# Altium PCB OVPSwitch.PcbDoc
Units mm, origin at the board's own origin, x right, y up, seen from the top; angles counter-clockwise.
Board outline 60 x 60 mm, 2 copper layers (Top Layer, Bottom Layer); 32 components, 19 nets, 99 pads, 32 vias.
Unrouted connection lines stored in the file: 58.
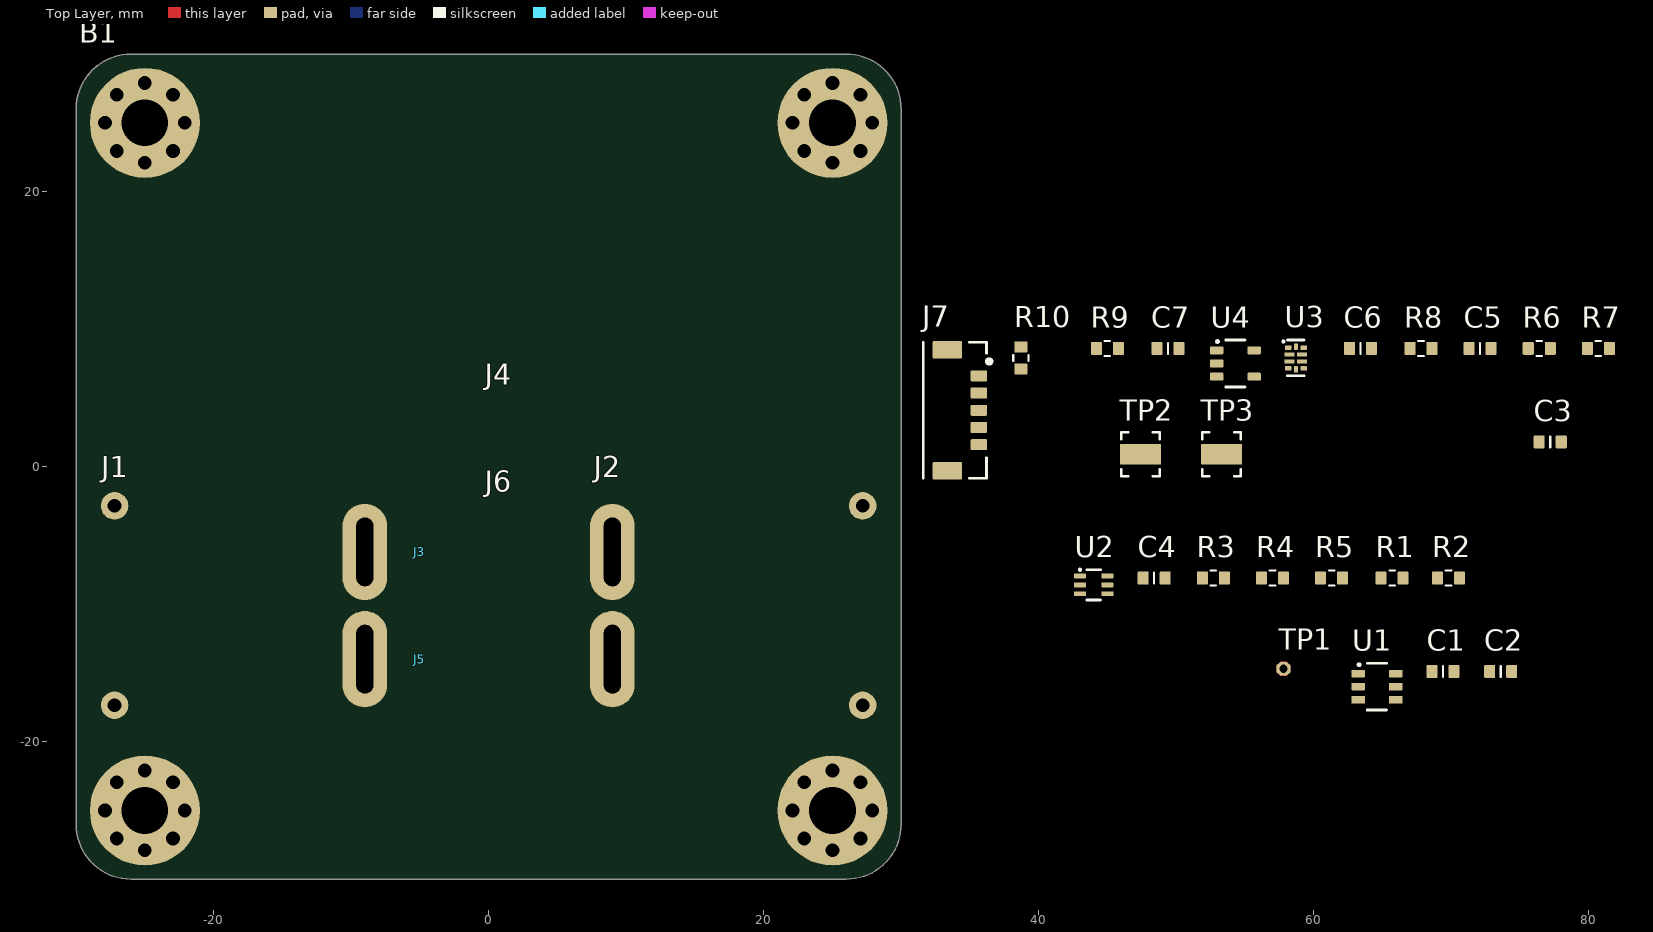
[diagram p0: Top Layer view]
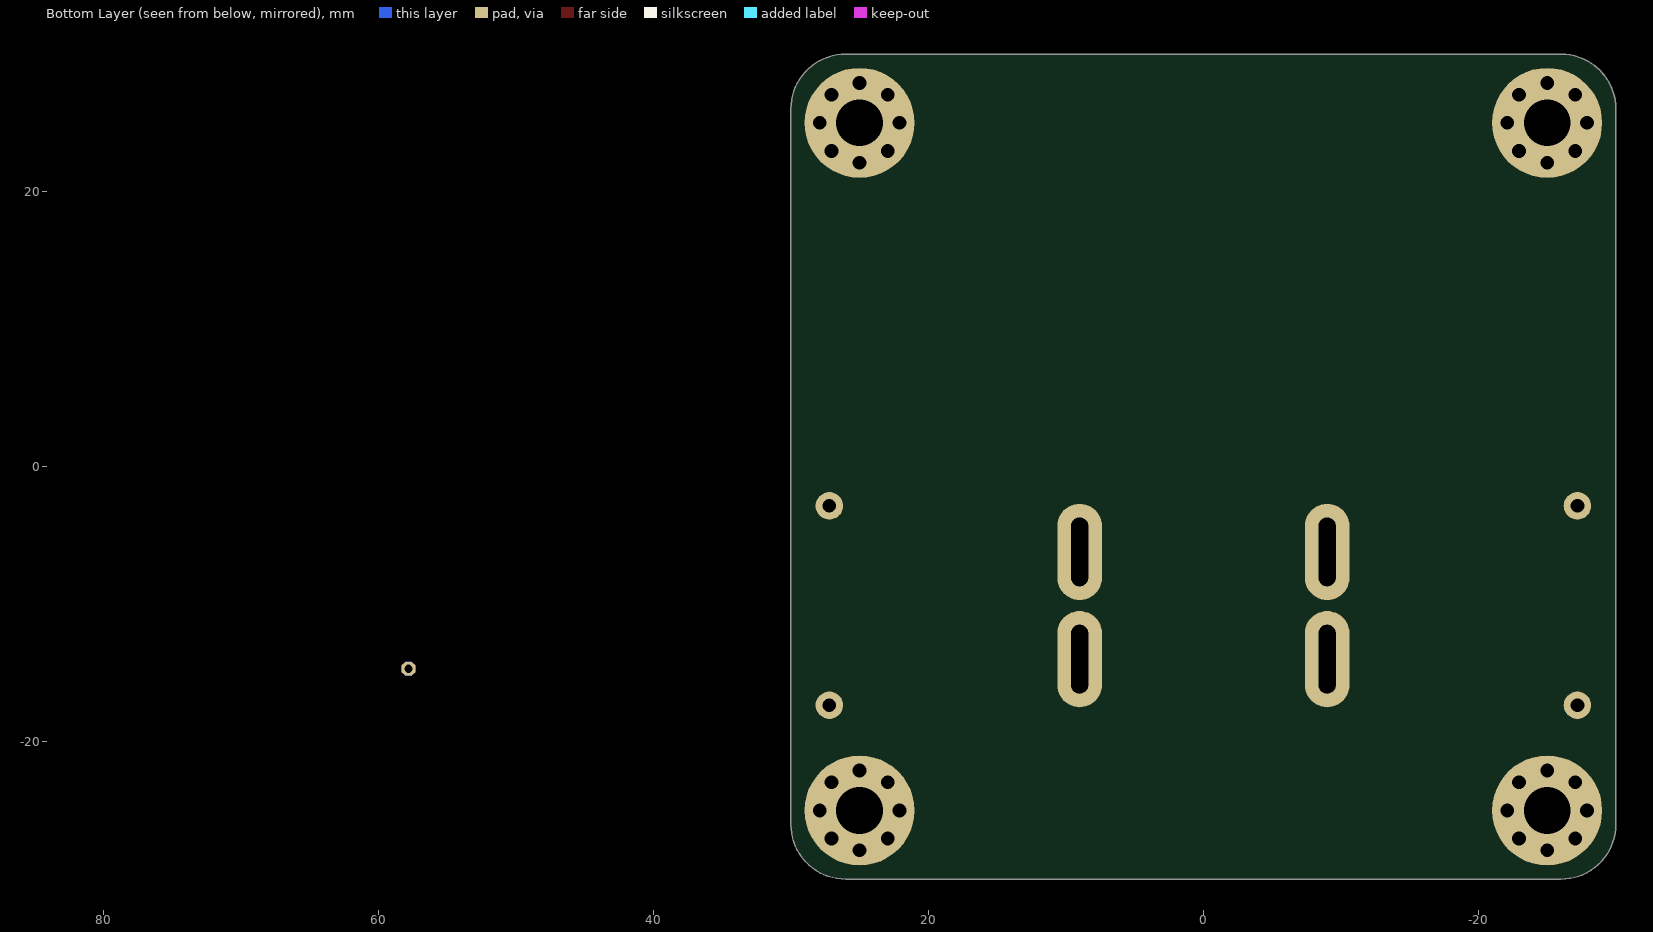
[diagram p1: Bottom Layer view, seen from below]

## Layer stack, top to bottom
Top Solder: solder mask 0.0102, Solder Resist, Dk 3.5
Top Layer: signal copper 0.0356
Dielectric 1: dielectric 0.32, FR-4, Dk 4.8
Bottom Layer: signal copper 0.0356
Bottom Solder: solder mask 0.0102, Solder Resist, Dk 3.5

## Board outline
-30,-26 -30,26 cw(c-26,26) -26,30 26,30 cw(c26,26) 30,26 30,-26 cw(c26,-26) 26,-30 -26,-30 cw(c-26,-26)

## Design rules (kind name [scope] priority, off if disabled: settings)
Clearance [All] p1: gap=0.254 ignorepadtopadclearanceinfootprint=FALSE except(0: Arc-Hole Track-Hole SMDPad-Hole THPad-Hole Via-Hole Fill-Hole Poly-Hole Region-Hole Text-Hole)
PolygonConnect [All] p1: connectstyle=Relief reliefconductorwidth=0.254 reliefentries=4 polygonreliefangle="90 Angle" airgapwidth=0.254
RoutingVias [All] p1: holewidth=0.711 width=1.27 viastyle="Through Hole" minholewidth=0.711 minwidth=1.27 maxholewidth=0.711 maxwidth=1.27
SolderMaskExpansion [All] p1: expansion=0.102 istentingtop=FALSE
Width [All] p1: maxlimit=0.254 minlimit=0.254 preferedwidth=0.254
30 further rules are at their usual default settings.

## Components (designator, comment, footprint, x,y, rotation, side; value= is the part's Value field where it differs from the comment)
B1 "Board Outline Square" PCB_OUTLINE_SQUARE 0,0 r0 top locked
C1 "Capacitor - Ceramic - Generic" CAPACITOR_0603(1608)_GENERIC 69.399,-14.9 r0 top value=100nF
C2 "Capacitor - Ceramic - Generic" CAPACITOR_0603(1608)_GENERIC 73.599,-14.9 r0 top value=1uF
C3 "Capacitor - Ceramic - Generic" CAPACITOR_0603(1608)_GENERIC 77.199,1.8 r0 top value=1uF
C4 "Capacitor - Ceramic - Generic" CAPACITOR_0603(1608)_GENERIC 48.4,-8.1 r0 top value=100nF
C5 "Capacitor - Ceramic - Generic" CAPACITOR_0603(1608)_GENERIC 72.1,8.6 r0 top value=100nF
C6 "Capacitor - Ceramic - Generic" CAPACITOR_0603(1608)_GENERIC 63.4,8.6 r0 top value=100nF
C7 "Capacitor - Ceramic - Generic" CAPACITOR_0603(1608)_GENERIC 49.4,8.6 r0 top value=120pF
J1 "PP45 Staple" CONNECTOR_ACCESSORY_PP45-STAPLE_ANDERSON -27.2,-10.1 r270 top
J2 "PP45 Staple" CONNECTOR_ACCESSORY_PP45-STAPLE_ANDERSON 27.2,-10.1 r90 top
J3 "PP45" CONNECTOR_BTOC_PP45_ANDERSON -9,-6.2 r270 top
J4 "PP45" CONNECTOR_BTOC_PP45_ANDERSON 9,-6.2 r90 top
J5 "PP45" CONNECTOR_BTOC_PP45_ANDERSON -9,-14 r270 top
J6 "PP45" CONNECTOR_BTOC_PP45_ANDERSON 9,-14 r90 top
J7 "Connector - Header - 5P 2M - Generic" CONNECTOR_HEADER_MOLEX_5055670581 33.9,4.1 r90 top
R1 "Resistor - Fixed - Generic" RESISTOR_0603(1608)_GENERIC 65.7,-8.1 r0 top value=100kR
R2 "Resistor - Fixed - Generic" RESISTOR_0603(1608)_GENERIC 69.8,-8.1 r0 top value=100kR
R3 "Resistor - Fixed - Generic" RESISTOR_0603(1608)_GENERIC 52.7,-8.1 r0 top value=100kR
R4 "Resistor - Fixed - Generic" RESISTOR_0603(1608)_GENERIC 57,-8.1 r0 top value=100kR
R5 "Resistor - Fixed - Generic" RESISTOR_0603(1608)_GENERIC 61.3,-8.1 r0 top value=2kR
R6 "Resistor - Fixed - Generic" RESISTOR_0603(1608)_GENERIC 76.4,8.6 r0 top value=100kR
R7 "Resistor - Fixed - Generic" RESISTOR_0603(1608)_GENERIC 80.7,8.6 r0 top value=200kR
R8 "Resistor - Fixed - Generic" RESISTOR_0603(1608)_GENERIC 67.8,8.6 r0 top value=100kR
R9 "Resistor - Fixed - Generic" RESISTOR_0603(1608)_GENERIC 45,8.6 r0 top value=10kR
R10 "Resistor - Fixed - Generic" RESISTOR_0603(1608)_GENERIC 38.7,7.9 r90 top value=10kR
TP1 "Test Point - THT" TESTPOINT_THT_OCTAGON 57.799,-14.7 r90 top
TP2 "519XTR" TESTPOINT_LOOP_SMD_KEYSTONE_519X 47.399,0.9 r0 top
TP3 "519XTR" TESTPOINT_LOOP_SMD_KEYSTONE_519X 53.299,0.9 r0 top
U1 "REF35409QDBV" SOT23-6(DBV0006A)_TI 64.599,-16 r0 top
U2 "TLV3603DCK" SC70-6(DCK0006A)_TI 44,-8.6 r0 top
U3 "TPS22997" WQFN-10(RYZ0010A)_TI 58.7,7.9 r0 top
U4 "SN74AUP1G32DBV" SOT23-5(DBV0005A)_TI 54.3,7.5 r0 top

## Footprints (in the part's own frame and the unit in brackets; to place one, negate y for a bottom-side part, rotate by r counter-clockwise, add the part's x,y. Pads: shape width x height; smd on the part's side, far side on the other; paste and mask are expansions set on the pad)
CAPACITOR_0603(1608)_GENERIC [mm]
  rrect20% 0.8x0.95 smd: 1(-0.8,0) 2(0.8,0)
  silkscreen extent 0,-0.4 0,0.4, body extent -0.8,-0.4 0.8,0.4, height 0.9
CONNECTOR_ACCESSORY_PP45-STAPLE_ANDERSON [mm]
  round 2 hole 1: 1(-7.25,0) 1(7.25,0)
  oval 7x3.25 on Mech16: ""(-4,18.2) ""(3.9,18.2)
  body extent -7.75,-0.5 7.75,0.5, height 9.4
CONNECTOR_BTOC_PP45_ANDERSON [mm]
  oval 7x3.25 hole 1.25 slot 5 at 0 deg: 1(0,0)
  oval 7x3.25 on Mech16: ""(-7.9,0) ""(0,7.92) ""(7.9,0)
  body extent -4.45,-28.1 3.96,0.52, height 8.39
CONNECTOR_HEADER_MOLEX_5055670581 [mm]
  rrect20% 0.8x1.2 smd: 1(2.5,-1.75) 2(1.25,-1.75) 3(0,-1.75) 4(-1.25,-1.75) 5(-2.5,-1.75)
  rrect20% 1.3x2.15 smd mask+0.076: M1(4.4,0.545) M2(-4.4,0.545)
  silkscreen extent -4.95,-2.65 4.95,2.3
PCB_OUTLINE_SQUARE [mm]
  round 8 hole 3.4: 1(-25,-25) 1(-25,25) 1(25,-25) 1(25,25)
RESISTOR_0603(1608)_GENERIC [mm]
  rrect20% 0.8x0.95 smd: 1(-0.8,0) 2(0.8,0)
  silkscreen extent -0.2,-0.55 0.2,0.55, body extent -0.8,-0.4 0.8,0.4, height 0.55
SC70-6(DCK0006A)_TI [mm]
  rrect20% 0.85x0.35 smd: 1(-1,0.65) 2(-1,0) 3(-1,-0.65) 4(1,-0.65) 5(1,0) 6(1,0.65)
  silkscreen extent -1.05,-1.1 0.5,1.15, body extent -1.05,-1 1.05,1, height 1
SOT23-5(DBV0005A)_TI [mm]
  rrect20% 0.972x0.558 smd: 1(-1.362,0.95) 2(-1.362,0) 3(-1.362,-0.95) 4(1.362,-0.95) 5(1.362,0.95)
  silkscreen extent -1.35,-1.7 0.7,1.7, body extent -1.5,-1.52 1.5,1.52, height 1.45
SOT23-6(DBV0006A)_TI [mm]
  rrect20% 0.972x0.558 smd: 1(-1.362,0.95) 2(-1.362,0) 3(-1.362,-0.95) 4(1.362,-0.95) 5(1.362,0) 6(1.362,0.95)
  silkscreen extent -1.35,-1.7 0.7,1.7, body extent -1.5,-1.52 1.5,1.52, height 1.45
TESTPOINT_LOOP_SMD_KEYSTONE_519X [mm]
  rrect10% 3x1.5 smd: 1(0,0)
  silkscreen extent -1.4,-1.6 1.4,1.6, body extent -1.25,-1.5 1.25,1.5, height 2.49
TESTPOINT_THT_OCTAGON [mm]
  oct 1x1 hole 0.6: 1(0,0)
  Top Layer region: -0.2,-0.5 -0.5,-0.2 -0.5,0.2 -0.2,0.5 0.2,0.5 0.5,0.2 0.5,-0.2 0.2,-0.5
  Bottom Layer region: -0.2,-0.5 -0.5,-0.2 -0.5,0.2 -0.2,0.5 0.2,0.5 0.5,0.2 0.5,-0.2 0.2,-0.5
WQFN-10(RYZ0010A)_TI [mil]
  rrect20% 19x12 smd mask+0.98: 1(-22.15,29.53) 4(-22.15,-29.53) 6(22.15,-29.53) 9(22.15,29.53)
  rrect20% 29x12 smd mask+0.98: 2(-17.72,9.84) 3(-17.72,-9.84) 7(17.72,-9.84) 8(17.72,9.84)
  rrect20% 12x18 smd mask+0.98: 5(0,-32.53) 10(0,32.53)
  silkscreen extent -37,-51 24,51, body extent -30,-39 30,39, height 31

## Part data
B1: library part Board_Outline_Square
C1 C4 C5 C6: library part CAP-CER_100NF_100V_20%_X7R_0603(1608), "100nF ±20% 100V Ceramic Capacitor X7R 0603(1608 Metric)", Manufacturer 1="Murata Electronics", Manufacturer Lifecycle 1=Active, Manufacturer Part Number 1=GRM188R72A104KA35D, Manufacturer Part Number 2=GRM188R72A104KA35J, Manufacturer Part Number 3=GRM188R72A104MA35D, Package/Case Imperial=0603, Package/Case Metric=1608, Temperature Coefficient=X7R, Tolerance=20%, Voltage - Rated=100V, Full Item="Ceramic Capacitor", Item=CAP-CER, Manufacturer 2="Murata Electronics", Manufacturer 3="Murata Electronics", Manufacturer Lifecycle 2=Active, Manufacturer Lifecycle 3=Active, Mounting Type=SMT, Name=CAP-CER_100NF_100V_20%_X7R_0603(1608)
C2 C3: library part CAP-CER_1UF_25V_20%_X7R_0603(1608), "1uF ±20% 25V Ceramic Capacitor X7R 0603(1608 Metric)", Manufacturer 1="Murata Electronics", Manufacturer Lifecycle 1=Active, Manufacturer Part Number 1=GCM188R71E105KA64D, Manufacturer Part Number 2=GCM188R71E105KA64J, Manufacturer Part Number 3=GCM188R71E105MA64D, Package/Case Imperial=0603, Package/Case Metric=1608, Temperature Coefficient=X7R, Tolerance=20%, Voltage - Rated=25V, Full Item="Ceramic Capacitor", Item=CAP-CER, Manufacturer 2="Murata Electronics", Manufacturer 3="Murata Electronics", Manufacturer Lifecycle 2=Active, Manufacturer Lifecycle 3=Active, Mounting Type=SMT, Name=CAP-CER_1UF_25V_20%_X7R_0603(1608)
C7: library part CAP-CER_120PF_100V_5%_C0G/NP0_0603(1608), "120pF ±5% 100V Ceramic Capacitor C0G/NP0 0603(1608 Metric)", Manufacturer 1="Murata Electronics", Manufacturer Lifecycle 1=Active, Manufacturer Part Number 1=GCM1885C2A121FA16D, Manufacturer Part Number 2=GCM1885C2A121JA16D, Manufacturer Part Number 3=GCM1885C2A121FA16J, Package/Case Imperial=0603, Package/Case Metric=1608, Temperature Coefficient=C0G/NP0, Tolerance=5%, Voltage - Rated=100V, Full Item="Ceramic Capacitor", Item=CAP-CER, Manufacturer 2="Murata Electronics", Manufacturer 3="Murata Electronics", Manufacturer Lifecycle 2=Active, Manufacturer Lifecycle 3=Active, Mounting Type=SMT, Name=CAP-CER_120PF_100V_5%_C0G/NP0_0603(1608)
J1 J2: library part "Connector - Accessory - Mechanical Support - Anderson PP45 Staple"
J3 J4 J5 J6: library part "Connector - Modular - 1P - Anderson PP45"
J7: library part CON_HDR_5P_1.25MM-PITCH_50V_2.4A_SMT_MOLEX_5055670581, "Connector Header 5 Pin 1.25mm Pitch Mating 50V 2.4A Rated 7 Walls Shrouded SMT Molex 5055670581", Current - Max=2.4A, Manufacturer 1=Molex, Manufacturer Lifecycle 1=Active, Manufacturer Part Number 1=5055670581, Voltage - Max=50V, Fastening Type="Locking Ramp", Full Item="Connector Header", Item=CON_HDR, Mounting Type=SMT, Name=CON_HDR_5P_1.25MM-PITCH_50V_2.4A_SMT_MOLEX_5055670581, Number of Positions=5, Pitch - Mating=1.25mm, Shrouding="7 Walls"
R1 R2 R3 R4: library part RES-FXD_100KR_0.1%_100MW_10PPM/°C_0603(1608), "100kR ±0.1% 100mW Chip Resistor 10ppm/°C 0603(1608 Metric)", Manufacturer 1=Panasonic, Manufacturer Lifecycle 1=Active, Manufacturer Part Number 1=ERA-3ARB104V, Package/Case Imperial=0603, Package/Case Metric=1608, Power=100mW, Temperature Coefficient=10ppm/°C, Tolerance=0.1%, Full Item="Chip Resistor", Item=RES-FXD, Mounting Type=SMT, Name=RES-FXD_100KR_0.1%_100MW_10PPM/°C_0603(1608)
R5: library part RES-FXD_2KR_0.1%_100MW_10PPM/°C_0603(1608), "2kR ±0.1% 100mW Chip Resistor 10ppm/°C 0603(1608 Metric)", Manufacturer 1=Panasonic, Manufacturer Lifecycle 1=Active, Manufacturer Part Number 1=ERA-3ARB202V, Package/Case Imperial=0603, Package/Case Metric=1608, Power=100mW, Temperature Coefficient=10ppm/°C, Tolerance=0.1%, Full Item="Chip Resistor", Item=RES-FXD, Mounting Type=SMT, Name=RES-FXD_2KR_0.1%_100MW_10PPM/°C_0603(1608)
R6 R8: library part RES-FXD_100KR_1%_100MW_100PPM/°C_0603(1608), "100kR ±1% 100mW Chip Resistor 100ppm/°C 0603(1608 Metric)", Manufacturer 1="Bourns Inc.", Manufacturer Lifecycle 1=Active, Manufacturer Part Number 1=CR0603-FX-1003ELF, Manufacturer Part Number 2=CR0603AFX-1003EAS, Manufacturer Part Number 3=CMP0603AFX-1003ELF, Package/Case Imperial=0603, Package/Case Metric=1608, Power=100mW, Temperature Coefficient=100ppm/°C, Tolerance=1%, Full Item="Chip Resistor", Item=RES-FXD, Manufacturer 2="Bourns Inc.", Manufacturer 3="Bourns Inc.", Manufacturer Lifecycle 2=Active, Manufacturer Lifecycle 3=Active, Mounting Type=SMT, Name=RES-FXD_100KR_1%_100MW_100PPM/°C_0603(1608)
R7: library part RES-FXD_200KR_1%_100MW_100PPM/°C_0603(1608), "200kR ±1% 100mW Chip Resistor 100ppm/°C 0603(1608 Metric)", Manufacturer 1="Bourns Inc.", Manufacturer Lifecycle 1=Active, Manufacturer Part Number 1=CR0603-FX-2003ELF, Manufacturer Part Number 2=CR0603AFX-2003EAS, Package/Case Imperial=0603, Package/Case Metric=1608, Power=100mW, Temperature Coefficient=100ppm/°C, Tolerance=1%, Full Item="Chip Resistor", Item=RES-FXD, Manufacturer 2="Bourns Inc.", Manufacturer Lifecycle 2=Active, Mounting Type=SMT, Name=RES-FXD_200KR_1%_100MW_100PPM/°C_0603(1608)
R9 R10: library part RES-FXD_10KR_1%_100MW_100PPM/°C_0603(1608), "10kR ±1% 100mW Chip Resistor 100ppm/°C 0603(1608 Metric)", Manufacturer 1="Bourns Inc.", Manufacturer Lifecycle 1=Active, Manufacturer Part Number 1=CR0603-FX-1002ELF, Manufacturer Part Number 2=CR0603AFX-1002EAS, Manufacturer Part Number 3=CMP0603-FX-1002ELF, Package/Case Imperial=0603, Package/Case Metric=1608, Power=100mW, Temperature Coefficient=100ppm/°C, Tolerance=1%, Full Item="Chip Resistor", Item=RES-FXD, Manufacturer 2="Bourns Inc.", Manufacturer 3="Bourns Inc.", Manufacturer Lifecycle 2=Active, Manufacturer Lifecycle 3=Active, Mounting Type=SMT, Name=RES-FXD_10KR_1%_100MW_100PPM/°C_0603(1608)
TP2 TP3: library part "Test Point - SMT - Loop - Keystone 519X"
U1: library part "IC - Power Management - Voltage Reference - TI REF35409", Supplier Part Number 1=REF35409QDBVR, Supplier 1="Texas Instruments", Supplier 2=Digi-Key, Supplier 3=Digi-Key, Supplier 4=Mouser, Supplier Part Number 2=296-REF35409QDBVRCT-ND, Supplier Part Number 3=296-REF35409QDBVRDKR-ND, Supplier Part Number 4=595-REF35409QDBVR
U2: library part "IC - Amplifier - Comparators - TI TLV3603DCK", Supplier Part Number 1=595-TLV3603DCKR, Supplier 1=Mouser, Supplier 2="Texas Instruments", Supplier 3=Digi-Key, Supplier 4=Digi-Key, Supplier 5=Mouser, Supplier 6="Texas Instruments", Supplier 7=Digi-Key, Supplier 8=Digi-Key, Supplier Part Number 2=TLV3603DCKR, Supplier Part Number 3=296-TLV3603DCKRCT-ND, Supplier Part Number 4=296-TLV3603DCKRDKR-ND, Supplier Part Number 5=595-TLV3603DCKT, Supplier Part Number 6=TLV3603DCKT, Supplier Part Number 7=296-TLV3603DCKTCT-ND, Supplier Part Number 8=296-TLV3603DCKTDKR-ND
U3: library part "IC - Power Management - Load Switch - TI TPS22997", Supplier Part Number 1=595-TPS22997RYZR, Supplier 1=Mouser, Supplier 2="Texas Instruments", Supplier 3=Digi-Key, Supplier 4=Digi-Key, Supplier Part Number 2=TPS22997RYZR, Supplier Part Number 3=296-TPS22997RYZRCT-ND, Supplier Part Number 4=296-TPS22997RYZRDKR-ND
U4: library part "IC - Logic - OR Gate - TI SN74AUP1G32", Supplier Part Number 1=595-SN74AUP1G32DBVR, Supplier 1=Mouser, Supplier 2="Texas Instruments", Supplier 3=Digi-Key, Supplier 4=Digi-Key, Supplier 5=Digi-Key, Supplier Part Number 2=SN74AUP1G32DBVR, Supplier Part Number 3=296-19079-1-ND, Supplier Part Number 4=296-19079-6-ND, Supplier Part Number 5=296-19079-2-ND

## Via types
v1: diameter 1.4, hole 1, Top Layer to Bottom Layer, 32 vias

## Nets (pads, with @x,y where several pads share a name; then routed paths per layer and width w, separated by ;. In a path a pad name is that pad's centre, name@x,y a point inside that pad or via, vN(x,y) a via of type N, cw(c..) or ccw(c..) an arc to the next point about the centre after c; other vN are vias at no path point)
2V048: R1.1 R3.1
3V3: C6.1 J7.4 R10.2 U4.5
4V096: C2.2 TP1.1 U1.6
5V: C1.1 C4.1 C5.1 J7.5 U1.3 U1.4 U2.6 U3.1
BATDIV: R1.2 R2.1 U2.4
GND: C1.2 C2.1 C3.1 C4.2 C5.2 C6.2 J1.1 J2.1 J5.1 J6.1 J7.3 J7.M1 J7.M2 R2.2 R5.2 R7.2 R8.1 U1.1 U1.2 U2.2 U3.5 U4.3
NetC3_2: C3.2 U1.5
NetC7_1: C7.1 U3.9
NetR4_2: R4.2 R5.1
NetR6_1: R6.1 U2.1
NetR6_2: R6.2 R7.1 U4.1
NetR8_2: R8.2 U2.5
NetR9_1: R9.1 U3.6
NetU3_10: U3.10 U4.4
OVR: J7.1 U4.2
STATE: J7.2 R10.1 U3.4
VDDDIV: R3.2 R4.1 U2.3
VIN: J3.1 TP2.1 U3.2 U3.3
VOUT: J4.1 TP3.1 U3.7 U3.8
pads on no net: B1.1 C7.2 J1. J2. J3. J4. J5. J6. R9.2
copper on no net:
  other v1: -25,-27.9 25,-27.9 -27.051,-27.051 -22.949,-27.051 22.949,-27.051 27.051,-27.051 -27.9,-25 -22.1,-25 22.1,-25 27.9,-25 -27.051,-22.949 -22.949,-22.949 22.949,-22.949 27.051,-22.949 -25,-22.1 25,-22.1 -25,22.1 25,22.1 -27.051,22.949 -22.949,22.949 22.949,22.949 27.051,22.949 -27.9,25 -22.1,25 22.1,25 27.9,25 -27.051,27.051 -22.949,27.051 22.949,27.051 27.051,27.051 -25,27.9 25,27.9